# Altium PCB microsmt_pnpboard_v17.pcbdoc (part 3 of 3)
Units mil, origin at the board's own origin, x right, y up, seen from the top; angles counter-clockwise.
Board outline 5834.36 x 5120.39 mil, 2 copper layers (Top Layer, Bottom Layer); 189 components, 130 nets, 641 pads, 1441 vias.
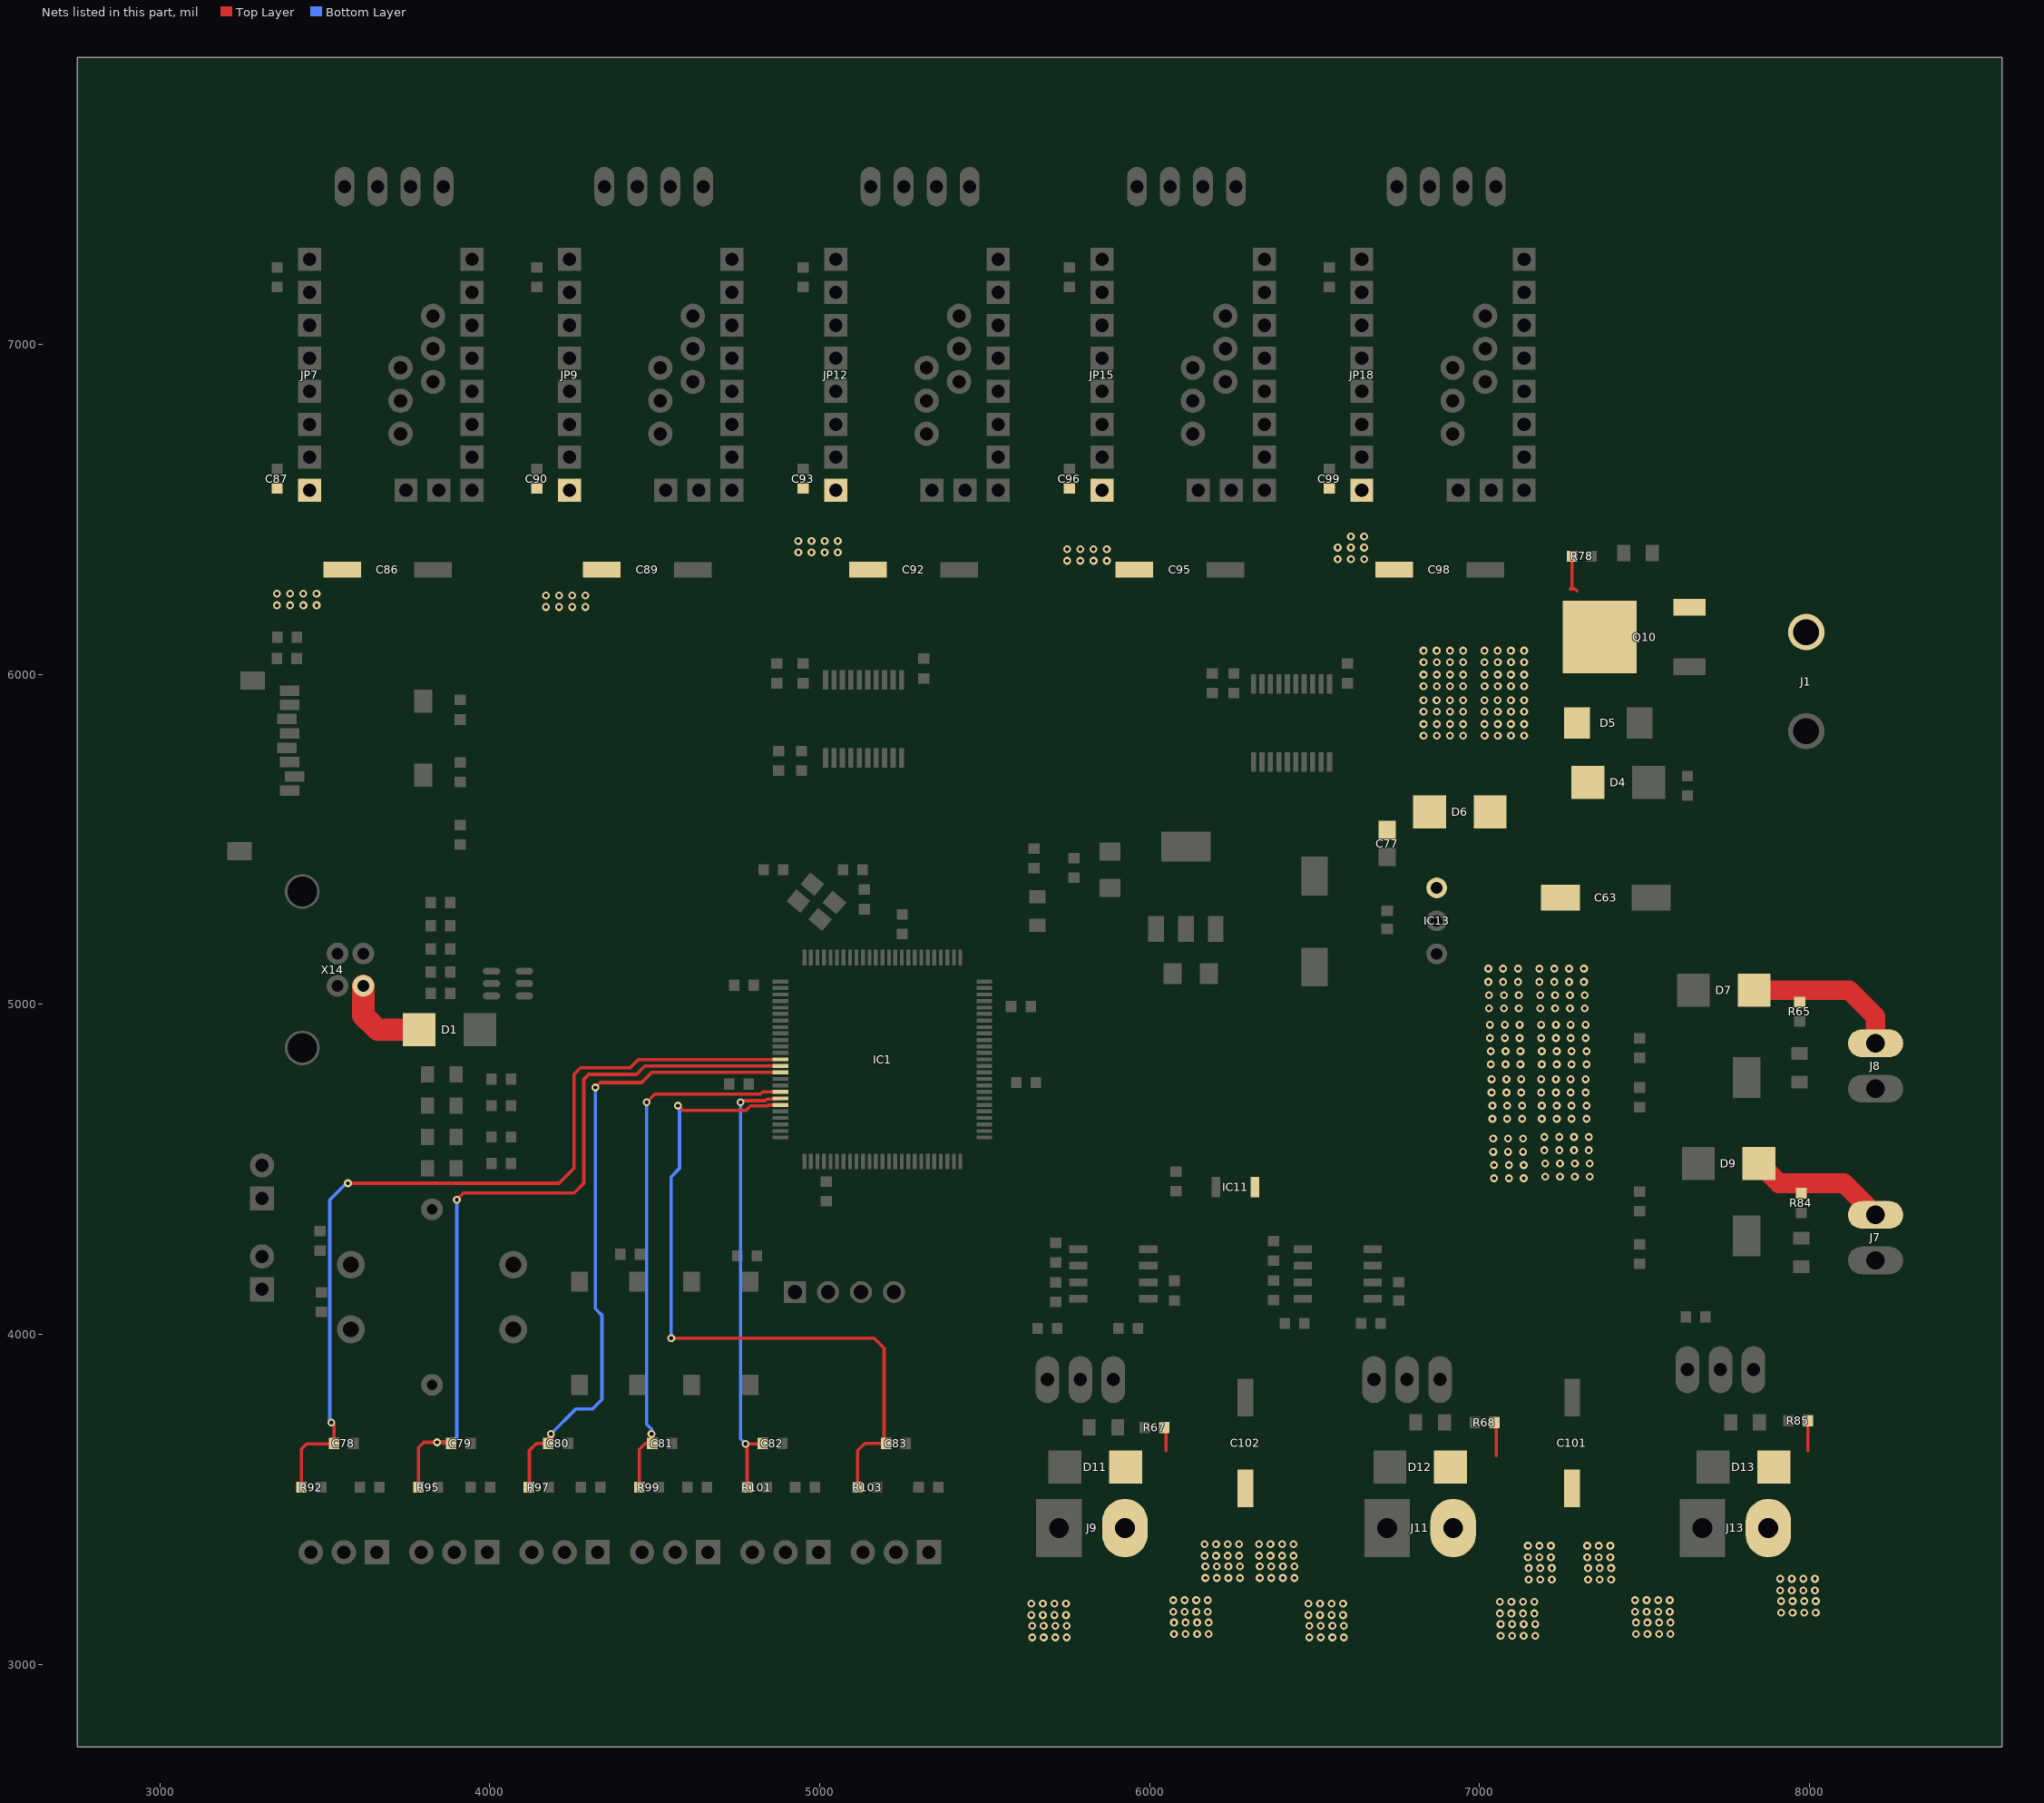
[diagram p3: the nets of this part, all layers, seen from the top]

## Via types
v1: diameter 24, hole 12, Top Layer to Bottom Layer, 1009 vias
v2: diameter 24.02, hole 12.01, Top Layer to Bottom Layer, 428 vias
v3: diameter 149.61, hole 137.8, Top Layer to Bottom Layer, 4 vias

## Nets (pads, with @x,y where several pads share a name; then routed paths per layer and width w, separated by ;. In a path a pad name is that pad's centre, name@x,y a point inside that pad or via, vN(x,y) a via of type N, cw(c..) or ccw(c..) an arc to the next point about the centre after c; other vN are vias at no path point) (continued)
VBB: C63.1 C86.1 C87.1 C89.1 C90.1 C92.1 C93.1 C95.1 C96.1 C98.1 C99.1 C101.1 C102.1 D4.C D5.1 D6.A D7.C D9.C D11.C D12.C D13.C IC11.3 J7.1 J8.1 J9.2 J11.2 J13.2 JP7.8 JP9.8 JP12.8 JP15.8 JP18.8 Q10.2 R65.1 R67.1 R68.1 R78.2 R84.1 R85.1 | length 1288.7
  Top Layer w10: R67.1@6045.16,3718.39 6050.5,3713.05 6050.5,3648.39 ; R68.1@7045.16,3733.39 7050.5,3728.05 7050.5,3633.39 ; R78.2@7280.84,6358.39 7280.84,6263.73 7275.5,6258.39 7290.5,6258.39 7295.5,6253.39 ; R85.1@7995.16,3738.39 7995.5,3738.05 7995.5,3648.39
  Top Layer w60: D7.C@7832.5,5043.39 8120.5,5043.39 8200.5,4963.39 J8.1@8200.5,4882.29 ; D9.C@7847.5,4518.39 7907.5,4458.39 8104.4,4458.39 J7.1@8200.5,4362.29
  other v1: 6830.61,5814.64 6870.57,5814.64 6910.53,5814.64 6950.48,5814.64 7015.61,5814.64 7055.57,5814.64 7095.53,5814.64 7135.48,5814.64 6830.55,5849.64 6870.51,5849.64 6910.46,5849.64 6950.42,5849.64 7015.55,5849.64 7055.51,5849.64 7095.46,5849.64 7135.42,5849.64 6830.58,5887.14 6870.54,5887.14 6910.49,5887.14 6950.45,5887.14 7015.58,5887.14 7055.54,5887.14 7095.49,5887.14 7135.45,5887.14 6830.52,5922.14 6870.47,5922.14 6910.43,5922.14 6950.39,5922.14 7015.52,5922.14 7055.47,5922.14 7095.43,5922.14 7135.39,5922.14 6830.61,5964.64 6870.57,5964.64 6910.53,5964.64 6950.48,5964.64 7015.61,5964.64 7055.57,5964.64 7095.53,5964.64 7135.48,5964.64 6830.55,5999.64 6870.51,5999.64 6910.46,5999.64 6950.42,5999.64 7015.55,5999.64 7055.51,5999.64 7095.46,5999.64 7135.42,5999.64 6830.58,6037.14 6870.54,6037.14 6910.49,6037.14 6950.45,6037.14 7015.58,6037.14 7055.54,6037.14 7095.49,6037.14 7135.45,6037.14 6830.52,6072.14 6870.47,6072.14 6910.43,6072.14 6950.39,6072.14 7015.52,6072.14 7055.47,6072.14 7095.43,6072.14 7135.39,6072.14 4170.61,6204.64 4210.57,6204.64 4250.53,6204.64 4290.48,6204.64 3355.61,6209.64 3395.57,6209.64 3435.53,6209.64 3475.48,6209.64 4170.55,6239.64 4210.51,6239.64 4250.46,6239.64 4290.42,6239.64 3355.55,6244.64 3395.51,6244.64 3435.46,6244.64 3475.42,6244.64 5750.61,6344.64 5790.57,6344.64 5830.53,6344.64 5870.48,6344.64 6570.61,6349.64 6610.57,6349.64 6650.53,6349.64 4935.61,6369.64 4975.57,6369.64 5015.53,6369.64 5055.48,6369.64 5750.55,6379.64 5790.51,6379.64 5830.46,6379.64 5870.42,6379.64 6570.55,6384.64 6610.51,6384.64 6650.46,6384.64 4935.55,6404.64 4975.51,6404.64 5015.46,6404.64 5055.42,6404.64 6610.5,6418.39 6650.5,6418.39
  other v2: 5644.25,3082.14 5679.25,3082.14 5714.25,3082.14 5749.25,3082.14 6484.25,3082.14 6519.25,3082.14 6554.25,3082.14 6589.25,3082.14 7064.25,3087.14 7099.25,3087.14 7134.25,3087.14 7169.25,3087.14 6074.25,3092.14 6109.25,3092.14 6144.25,3092.14 6179.25,3092.14 7474.25,3092.14 7509.25,3092.14 7544.25,3092.14 7579.25,3092.14 5644.25,3117.14 5679.25,3117.14 5714.25,3117.14 5749.25,3117.14 6484.25,3117.14 6519.25,3117.14 6554.25,3117.14 6589.25,3117.14 7064.25,3122.14 7099.25,3122.14 7134.25,3122.14 7169.25,3122.14 6074.25,3127.14 6109.25,3127.14 6144.25,3127.14 6179.25,3127.14 7474.25,3127.14 7509.25,3127.14 7544.25,3127.14 7579.25,3127.14 5641.75,3149.64 5676.75,3149.64 5711.75,3149.64 5746.75,3149.64 6481.75,3149.64 6516.75,3149.64 6551.75,3149.64 6586.75,3149.64 7061.75,3154.64 7096.75,3154.64 7131.75,3154.64 7166.75,3154.64 7914.25,3157.14 7949.25,3157.14 7984.25,3157.14 8019.25,3157.14 6071.75,3159.64 6106.75,3159.64 6141.75,3159.64 6176.75,3159.64 7471.75,3159.64 7506.75,3159.64 7541.75,3159.64 7576.75,3159.64 5641.75,3184.64 5676.75,3184.64 5711.75,3184.64 5746.75,3184.64 6481.75,3184.64 6516.75,3184.64 6551.75,3184.64 6586.75,3184.64 7061.75,3189.64 7096.75,3189.64 7131.75,3189.64 7166.75,3189.64 7914.25,3192.14 7949.25,3192.14 7984.25,3192.14 8019.25,3192.14 6071.75,3194.64 6106.75,3194.64 6141.75,3194.64 6176.75,3194.64 7471.75,3194.64 7506.75,3194.64 7541.75,3194.64 7576.75,3194.64 7911.75,3224.64 7946.75,3224.64 7981.75,3224.64 8016.75,3224.64 7149.25,3257.14 7184.25,3257.14 7219.25,3257.14 7329.25,3257.14 7364.25,3257.14 7399.25,3257.14 7911.75,3259.64 7946.75,3259.64 7981.75,3259.64 8016.75,3259.64 6169.25,3262.14 6204.25,3262.14 6239.25,3262.14 6274.25,3262.14 6334.25,3262.14 6369.25,3262.14 6404.25,3262.14 6439.25,3262.14 7149.25,3292.14 7184.25,3292.14 7219.25,3292.14 7329.25,3292.14 7364.25,3292.14 7399.25,3292.14 6169.25,3297.14 6204.25,3297.14 6239.25,3297.14 6274.25,3297.14 6334.25,3297.14 6369.25,3297.14 6404.25,3297.14 6439.25,3297.14 7146.75,3324.64 7181.75,3324.64 7216.75,3324.64 7326.75,3324.64 7361.75,3324.64 7396.75,3324.64 6166.75,3329.64 6201.75,3329.64 6236.75,3329.64 6271.75,3329.64 6331.75,3329.64 6366.75,3329.64 6401.75,3329.64 6436.75,3329.64 7146.75,3359.64 7181.75,3359.64 7216.75,3359.64 7326.75,3359.64 7361.75,3359.64 7396.75,3359.64 6166.75,3364.64 6201.75,3364.64 6236.75,3364.64 6271.75,3364.64 6331.75,3364.64 6366.75,3364.64 6401.75,3364.64 6436.75,3364.64 7044.25,4473.39 7089.25,4473.39 7134.25,4473.39 7199.25,4478.39 7244.25,4478.39 7289.25,4478.39 7334.25,4478.39 7044.25,4513.39 7089.25,4513.39 7134.25,4513.39 7199.25,4518.39 7244.25,4518.39 7289.25,4518.39 7334.25,4518.39 7041.75,4553.39 7086.75,4553.39 7131.75,4553.39 7196.75,4558.39 7241.75,4558.39 7286.75,4558.39 7331.75,4558.39 7041.75,4593.39 7086.75,4593.39 7131.75,4593.39 7196.75,4598.39 7241.75,4598.39 7286.75,4598.39 7331.75,4598.39 7039.25,4653.39 7084.25,4653.39 7129.25,4653.39 7189.25,4653.39 7234.25,4653.39 7279.25,4653.39 7324.25,4653.39 7039.25,4693.39 7084.25,4693.39 7129.25,4693.39 7189.25,4693.39 7234.25,4693.39 7279.25,4693.39 7324.25,4693.39 7036.75,4733.39 7081.75,4733.39 7126.75,4733.39 7186.75,4733.39 7231.75,4733.39 7276.75,4733.39 7321.75,4733.39 7036.75,4773.39 7081.75,4773.39 7126.75,4773.39 7186.75,4773.39 7231.75,4773.39 7276.75,4773.39 7321.75,4773.39 7034.25,4818.39 7079.25,4818.39 7124.25,4818.39 7189.25,4818.39 7234.25,4818.39 7279.25,4818.39 7324.25,4818.39 7034.25,4858.39 7079.25,4858.39 7124.25,4858.39 7189.25,4858.39 7234.25,4858.39 7279.25,4858.39 7324.25,4858.39 7031.75,4898.39 7076.75,4898.39 7121.75,4898.39 7186.75,4898.39 7231.75,4898.39 7276.75,4898.39 7321.75,4898.39 7031.75,4938.39 7076.75,4938.39 7121.75,4938.39 7186.75,4938.39 7231.75,4938.39 7276.75,4938.39 7321.75,4938.39 7029.25,4988.39 7074.25,4988.39 7119.25,4988.39 7184.25,4988.39 7229.25,4988.39 7274.25,4988.39 7319.25,4988.39 7029.25,5028.39 7074.25,5028.39 7119.25,5028.39 7184.25,5028.39 7229.25,5028.39 7274.25,5028.39 7319.25,5028.39 7026.75,5068.39 7071.75,5068.39 7116.75,5068.39 7181.75,5068.39 7226.75,5068.39 7271.75,5068.39 7316.75,5068.39 7026.75,5108.39 7071.75,5108.39 7116.75,5108.39 7181.75,5108.39 7226.75,5108.39 7271.75,5108.39 7316.75,5108.39
VBB_IN: J1.2 Q10.3
VBBREG: C77.1 D6.C IC13.1
VUSB: D1.A X14.VBUS | length 277
  Top Layer w68: X14.VBUS@3617,5056.39 3617.37,5056.02 3617.37,4966.52 3660.5,4923.39 D1.A@3786.5,4923.39
X_MAX: C79.1 IC1.39 R95.2 | length 2346.3
  Top Layer w10: R95.2@3784.39,3537.01 3784.39,3657.27 3800.5,3673.39 v1(3840.5,3673.39) 3879.23,3673.39 C79.1@3882.81,3669.81 ; v2(3900.5,4408.39) 3920.5,4428.39 4255.5,4428.39 4285.5,4458.39 4285.5,4773.39 4300.5,4788.39 4445.5,4788.39 4470.5,4813.38 IC1.39@4881.5,4813.38
  Bottom Layer w10: v1(3840.5,3673.39) 3885.5,3673.39 3900.5,3688.39 v2(3900.5,4408.39)
X_MIN: C78.1 IC1.38 R92.2 | length 2689.3
  Top Layer w10: R92.2@3430.05,3537.01 3430.05,3652.94 3445.5,3668.39 3527.06,3668.39 C78.1@3528.48,3669.81 3528.48,3725.41 v1(3520.5,3733.39) ; v2@3565.5,4458.39 4210.5,4458.39 4255.5,4503.39 4255.5,4788.39 4275.5,4808.39 4425.81,4808.39 4450.81,4833.38 IC1.38@4881.5,4833.38
  Bottom Layer w10: v1(3520.5,3733.39) 3520.5,3728.39 3515.5,3733.39 3515.5,4408.39 3565.5,4458.39 v2(3570.5,4458.39)
Y_MAX: C81.1 IC1.43 R99.2 | length 1621.6
  Top Layer w10: R99.2@4453.68,3537.01 4453.68,3651.56 4471.92,3669.81 C81.1@4493.05,3669.81 4490.5,3672.35 v2(4490.5,3698.39) ; v2(4475.5,4703.39) 4500.5,4728.39 4820.5,4728.39 4827.5,4735.38 IC1.43@4881.5,4735.38
  Bottom Layer w10: v2(4475.5,4703.39) 4475.5,3728.39 4490.5,3713.39 v2(4490.5,3698.39)
Y_MIN: C80.1 IC1.40 R97.2 | length 1941.9
  Top Layer w10: R97.2@4119.03,3537.01 4120.5,3538.48 4120.5,3648.39 4141.92,3669.81 C80.1@4178.09,3669.81 ; v2(4320.5,4748.39) 4335.5,4763.39 4460.5,4763.39 4491.5,4794.38 IC1.40@4881.5,4794.38
  Top Layer w20: C80.1@4178.09,3669.81 4185.5,3677.22 v1(4185.5,3698.39)
  Bottom Layer w10: v1(4185.5,3698.39) 4260.93,3773.81 4310.93,3773.81 4340.5,3803.39 4340.5,4058.39 4320.5,4078.39 v2(4320.5,4748.39)
Z_MAX: C83.1 IC1.45 R103.2 | length 2196.1
  Top Layer w10: v2(4550.5,3988.39) 5165.5,3988.39 5195.5,3958.39 5195.5,3676.01 C83.1@5201.7,3669.81 5136.92,3669.81 5115.09,3647.98 R103.2@5115.09,3537.01 ; v2(4570.5,4693.39) 4571.5,4693.39 4585.5,4679.39 4777.5,4679.39 4790.5,4692.39 4842.13,4692.39 4844.82,4695.38 IC1.45@4881.5,4695.38
  Bottom Layer w10: v2(4550.5,3988.39) 4550.5,4478.39 4575.5,4503.39 4575.5,4688.39 v2(4570.5,4693.39)
Z_MIN: C82.1 IC1.44 R101.2 | length 1353.4
  Top Layer w10: v2(4760.5,4703.39) 4765.5,4708.39 4835.5,4708.39 4840.5,4713.39 4879.5,4713.39 IC1.44@4881.5,4715.38 ; R101.2@4780.45,3537.01 4780.45,3663.44 v2(4775.5,3668.39) 4826.27,3668.39 C82.1@4827.69,3669.81
  Bottom Layer w10: v2(4760.5,4703.39) 4760.5,3683.39 v2(4775.5,3668.39)
"": 
pads on no net: H1.1 H1.2 H2.1 H2.2 H3.1 H3.2 H4.1 H4.2 H5.1 H5.2 IC1.1 IC1.2 IC1.3 IC1.4 IC1.5 IC1.6 IC1.7 IC1.8 IC1.9 IC1.13 IC1.14 IC1.16 IC1.18 IC1.20 IC1.21 IC1.24 IC1.25 IC1.26 IC1.27 IC1.52 IC1.60 IC1.61 IC1.62 IC1.63 IC1.67 IC1.86 IC1.87 IC1.88 IC1.89 IC1.90 IC1.91 IC1.92 IC1.93 IC1.94 IC1.95 IC1.100 IC4.14 IC9.2 IC9.9 IC9.14 IC9.19 IC14.1 IC14.8 IC15.1 IC15.4 IC15.5 IC15.8 JP71.4 JP71.5 JP91.4 JP91.5 JP121.4 JP121.5 JP151.4 JP151.5 JP181.4 JP181.5 Q2.2 Q2.4 S1.3 S2.3 S3.1 S3.3 U1.1 U1.8 U1.CD1 U1.GND3 X14.S1 X14.S2
copper on no net:
  other v3: 3295.5,3233.39 8220.5,3233.39 3285.5,7458.39 8215.5,7458.39

## Polygon pours and split planes (outlines as drawn)
1B on Top Layer (solid, remove dead copper): 3400.5,7103.39 3405.5,7108.39 3500.5,7108.39 3505.5,7113.39 3505.5,7328.39 3490.5,7343.39 3460.5,7343.39 3450.5,7353.39 3450.5,7538.39 3475.5,7563.39 3585.5,7563.39 3605.5,7543.39 3605.5,7023.39 3590.5,7008.39 3410.5,7008.39 3400.5,7018.39
1A on Top Layer (solid, remove dead copper, pour order 1): 3400.5,6988.39 3410.5,6998.39 3600.5,6998.39 3615.5,7013.39 3615.5,7543.39 3635.5,7563.39 3688.6,7563.39 3710.3,7541.68 3710.3,6998.19 3670.5,6958.39 3670.5,6933.39 3645.5,6908.39 3410.5,6908.39 3400.5,6918.39
2A on Bottom Layer (solid, remove dead copper, pour order 2): 3705.11,7509.33 3705.11,7403 3680.5,7378.39 3535.5,7378.39 3510.5,7353.39 3510.5,6914.25 3504.4,6908.15 3410.26,6908.15 3400.5,6898.39 3400.5,6813.39 3405.5,6808.39 3580.5,6808.39 3600.5,6828.39 3600.5,7248.39 3625.5,7273.39 3785.5,7273.39 3805.5,7293.39 3805.5,7543.39 3790.5,7558.39 3725.5,7558.39 3705.5,7538.39 3705.5,7509.72
2B on Bottom Layer (solid, remove dead copper, pour order 3): 3400.5,6793.39 3405.5,6798.39 3595.5,6798.39 3610.5,6813.39 3610.5,7228.39 3645.5,7263.39 3800.5,7263.39 3815.5,7278.39 3815.5,7533.39 3840.5,7558.39 3935.5,7558.39 3980.5,7513.39 3980.5,7313.39 3975.5,7308.39 3914.04,7308.39 3896.53,7290.87 3896.53,7149.41 3890.5,7143.39 3800.5,7143.39 3780.5,7123.39 3780.5,7008.39 3760.5,6988.39 3700.5,6988.39 3680.5,6968.39 3680.5,6758.39 3635.5,6713.39 3410.5,6713.39 3400.5,6723.39
VBB_IN on Top Layer (solid, remove dead copper, pour order 4): 8240.5,6453.39 8220.5,6473.39 7620.5,6473.39 7595.5,6448.39 7595.5,6323.39 7575.5,6303.39 7550.5,6303.39 7525.5,6278.39 7525.5,6146.08 7558.2,6113.39 7695.5,6113.39 7720.5,6088.39 7720.5,5938.39 7745.5,5913.39 8235.5,5913.39 8240.5,5918.39
VBB on Top Layer (solid, remove dead copper, pour order 5): 7470.5,6303.39 7280.5,6303.39 7260.5,6283.39 7260.5,6188.39 7180.5,6108.39 6825.5,6108.39 6765.5,6048.39 6765.5,5683.39 6780.5,5668.39 6919,5668.39 6941,5646.39 6941,5271.47 6959.08,5253.39 7368.52,5253.39 7383.3,5268.16 7383.3,5901.18 7405.5,5923.39 7475.5,5923.39 7490.5,5938.39 7490.5,6283.39
$2N167 on Top Layer (solid, remove dead copper, pour order 6): 7420.5,5778.39 7420.5,5898.39 7430.5,5908.39 7505.5,5908.39 7520.5,5923.39 7520.5,6073.39 7525.5,6078.39 7685.5,6078.39 7700.5,6063.39 7700.5,5673.39 7695.5,5668.39 7600.5,5668.39 7590.5,5678.39 7590.5,5726.2 7570.5,5746.2 7548.32,5768.39 7425.5,5768.39 7420.5,5773.39
VBBREG on Top Layer (solid, remove dead copper, pour order 7): 6695.5,5643.39 6905.5,5643.39 6920.5,5628.39 6920.5,5318.39 6905.5,5303.39 6770.5,5303.39 6765.5,5308.39 6765.5,5484.19 6758.44,5491.25 6692.64,5491.25 6680.5,5503.39 6680.5,5633.39 6690.5,5643.39
GND on Top Layer (solid, remove dead copper, pour order 8): 6670.5,5263.39 6815.5,5263.39 6830.5,5248.39 6830.5,5228.39 6840.5,5218.39 6915.5,5218.39 6920.5,5223.39 6920.5,5288.39 6915.5,5293.39 6765.5,5293.39 6755.5,5303.39 6755.5,5468.39 6740.5,5483.39 6230.5,5483.39 6200.5,5453.39 6200.5,5332.94 6214.34,5319.1 6654.79,5319.1 6665.5,5308.39 6665.5,5268.39
GND on Top Layer (solid, remove dead copper, pour order 9): 6200.5,5463.39 6200.5,5623.39 6220.5,5643.39 6660.5,5643.39 6670.5,5633.39 6670.5,5448.39 6660.5,5438.39 6200.5,5438.39
3.3V on Top Layer (solid, remove dead copper, pour order 10): 5610.5,5523.39 5740.5,5523.39 5860.5,5643.39 6170.14,5643.39 6180.5,5633.03 6180.5,5333.39 6170.5,5323.39 6150.5,5323.39 6130.5,5303.39 6130.5,5163.39 6120.5,5153.39 6070.5,5153.39 6060.5,5163.39 6060.5,5283.39 6040.5,5303.39 5934.5,5303.39 5927.5,5310.39 5927.5,5400.03 5919.15,5408.39 5696.52,5408.39 5687.45,5417.46 5687.45,5439.64 5684.04,5443.05 5615.84,5443.05 5605.5,5453.39 5605.5,5518.39
VBB on Top Layer (solid, remove dead copper, pour order 11): 6305.5,4478.39 6330.5,4503.39 6330.5,4643.39 6375.5,4688.39 7383.27,4688.39 7383.27,4426.16 7315.5,4358.39 6310.5,4358.39 6305.5,4363.39
VBB on Top Layer (solid, pour order 12): 6945.5,4713.39 6875.5,4643.39 7380.5,4648.39 7383.3,4653.98 7383.3,4761.18 6952.7,4761.18 6945.5,4768.39
12VREG on Top Layer (solid, pour order 13): 6165.5,4493.39 6210.5,4493.39 6230.5,4473.39 6230.5,4408.39 6240.5,4398.39 6280.5,4398.39 6295.5,4383.39 6295.5,4363.39 6285.5,4353.39 6170.5,4353.39 6165.5,4358.39
VBB on Top Layer (solid, remove dead copper, pour order 14): 6941,5375.92 7383.3,5375.92 7383.3,4668.39 7040.5,4668.39 6945.5,4763.39 6945.5,5371.42
VBB on Top Layer (solid, remove dead copper, pour order 15): 3323.83,6593.19 3575.67,6593.19 3610.72,6558.15 3610.72,6413.17 3630.5,6393.39 3680.5,6393.39 3705.5,6368.39 3705.5,6180.73 3690.62,6165.85 3318.04,6165.85 3300.5,6183.39 3300.5,6583.39 3310.5,6593.39 3320.5,6593.39 3320.7,6593.19
VBB on Top Layer (solid, remove dead copper, pour order 16): 4121.55,6593.19 4376.35,6593.19 4411.39,6558.15 4411.39,6387.5 4425.5,6373.39 4480.5,6373.39 4500.5,6353.39 4500.5,6174.27 4480.02,6153.8 4130.09,6153.8 4120.5,6163.39 4120.5,6592.14
VBB on Top Layer (solid, remove dead copper, pour order 17): 4925.31,6593.19 5205.7,6593.19 5225.5,6573.39 5225.5,6423.39 5235.5,6413.39 5275.42,6413.39 5285.11,6403.7 5285.11,6298 5275.5,6288.39 4934.29,6288.39 4905.08,6317.6 4905.08,6587.97 4910.5,6593.39 4925.11,6593.39
VBB on Top Layer (solid, remove dead copper, pour order 18): 5731.54,6576.41 5997.48,6576.41 6010.5,6563.39 6010.5,6403.39 6015.5,6398.39 6071.53,6398.39 6092.2,6377.72 6092.2,6210.08 6075.5,6193.39 5740.5,6193.39 5715.5,6218.39 5715.5,6573.39 5720.5,6578.39 5729.56,6578.39
VBB on Top Layer (solid, remove dead copper, pour order 19): 6770.7,6593.19 6795.5,6568.39 6795.5,6473.39 6815.5,6453.39 6885.5,6453.39 6895.5,6443.39 6895.5,6298.2 6879.6,6282.3 6526.59,6282.3 6510.5,6298.39 6510.5,6573.39 6530.3,6593.19
GND on Top Layer (solid, remove dead copper, pour order 20): 5615.5,4933.39 5615.5,5263.39 5625.5,5273.39 5710.5,5273.39 5720.5,5283.39 5720.5,5368.39 5745.07,5392.95 5905.5,5392.95 5915.5,5382.95 5915.5,5268.39 5924,5259.88 5935.06,5259.88 6038.65,5259.88 6050.5,5248.03 6050.5,5133.39 6060.5,5123.39 6095.5,5123.39 6105.5,5113.39 6105.5,4898.39 6090.5,4883.39 5635.5,4883.39 5615.5,4903.39
3.3V on Top Layer (solid, remove dead copper, pour order 21): 5585.5,4883.39 5555.5,4883.39 5545.5,4893.39 5545.5,5143.39 5510.5,5178.39 5245.5,5178.39 5235.5,5188.39 5220.5,5203.39 5220.5,5233.39 5225.5,5238.39 5230.5,5238.39 5275.5,5238.39 5290.5,5253.39 5290.5,5513.39 5300.5,5523.39 5645.5,5523.39 5650.5,5518.39 5650.5,5443.05 5615.16,5443.05 5605.5,5433.39 5605.5,4893.39 5595.5,4883.39
VBB on Mid-Layer 2 (solid, remove dead copper, pour order 22): 3355.97,6593.19 7155.2,6593.19 7190.5,6557.89 7190.5,5793.39 7135.5,5738.39 6685.5,5738.39 6670.5,5753.39 6670.5,6073.39 6620.5,6123.39 3330.5,6123.39 3300.5,6153.39 3300.5,6578.39 3315.5,6593.39 3355.78,6593.39
3.3V on Mid-Layer 2 (solid, remove dead copper, pour order 23): 7790.46,7203.43 7880.5,7113.39 7880.5,5323.39 7820.5,5263.39 5394.19,5263.39 5376.55,5281.02 5376.55,5484.44 5400.5,5508.39 5800.5,5508.39 5860.5,5568.39 5860.5,5713.39 5875.5,5728.39 6500.5,5728.39 6545.5,5683.39 7233.52,5683.39 7332.65,5782.52 7332.65,6561.24 7250.5,6643.39 3340.5,6643.39 3315.5,6668.39 3315.5,7192.23 3326.7,7203.43
VBB on Mid-Layer 2 (solid, remove dead copper, pour order 24): 8195.45,5153.39 8290.45,5058.39 8290.45,3493.34 8230.5,3433.39 8130.5,3433.39 8090.5,3393.39 8090.5,3233.39 7915.5,3058.39 5735.5,3058.39 5595.5,3198.39 5595.5,3713.39 5635.5,3753.39 7220.5,3753.39 7240.5,3773.39 7240.5,3958.39 7185.5,4013.39 7020.97,4013.39 7000.97,4033.39 7000.97,5138.85 7015.5,5153.39
3.3V on Mid-Layer 2 (solid, remove dead copper, pour order 25): 3360.67,7258.56 3485.5,7383.39 7625.12,7383.39 8270.5,6738 8270.5,5303.39 8230.5,5263.39 7785.5,5263.39 7780.5,5268.39 7780.5,6553.39 7450.5,6883.39 3510.5,6883.39 3360.67,7033.21
5V on Top Layer (solid, remove dead copper, pour order 26): 6145.5,4988.39 6145.5,5118.09 6160.8,5133.39 6160.8,5248.68 6190.5,5278.39 6530.5,5278.39 6590.5,5218.39 6790.5,5218.39 6820.5,5188.39 6905.5,5188.39 6920.5,5173.39 6920.5,4918.39 6885.5,4883.39 6170.5,4883.39 6145.5,4908.39
5V on Mid-Layer 2 (solid, remove dead copper, pour order 27): 6894.73,5193.39 6931.72,5156.4 6931.72,4199.61 6690.5,3958.39 5625.5,3958.39 5475.5,3808.39 5475.5,3298.39 5380.5,3203.39 3485.5,3203.39 3400.5,3288.39 3400.5,3608.39 3715.5,3923.39 5165.5,3923.39 5645.5,4403.39 6460.5,4403.39 6596.5,4539.39 6596.5,5164.39 6625.5,5193.39
GND on Top Layer (solid, remove dead copper, pour order 28): 5000.5,4943.39 5000.5,4668.39 5015.5,4653.39 5375.5,4653.39 5385.5,4663.39 5385.5,4988.39 5370.5,5003.39 5020.5,5003.39 5000.5,4983.39
GND on Top Layer (solid, remove dead copper, pour order 29): 3840.5,5618.39 3840.5,5743.39 3830.5,5753.39 3699.05,5753.39 3693.55,5747.89 3693.55,5620.34 3695.5,5618.39
GND on Top Layer (solid, remove dead copper, pour order 30): 6160.5,4778.39 6175.5,4793.39 6540.5,4793.39 6590.5,4843.39 6880.5,4843.39 6890.5,4833.39 6890.5,4723.39 6880.5,4713.39 6325.5,4713.39 6300.5,4688.39 6300.5,4498.39 6275.5,4473.39 6275.5,4418.39 6270.5,4413.39 6240.5,4413.39 6240.5,4533.39 6225.5,4518.39 6165.5,4518.39 6160.5,4523.39
GND on Top Layer (solid, remove dead copper, pour order 31): 3558.14,3626.41 3558.14,3756.03 3590.5,3788.39 5060.5,3788.39 5075.5,3773.39 5075.5,3603.39 5065.5,3593.39 4875.5,3593.39 4855.5,3613.39 4855.5,3698.39 4845.5,3708.39 4750.5,3708.39 4735.5,3693.39 4735.5,3603.39 4720.5,3588.39 4545.5,3588.39 4530.5,3603.39 4530.5,3708.47 4522.7,3716.27 4443.38,3716.27 4430.5,3703.39 4430.5,3618.39 4420.5,3608.39 4230.5,3608.39 4215.5,3623.39 4215.5,3718.39 4210.5,3723.39 4105.5,3723.39 4095.5,3713.39 4095.5,3628.39 4085.5,3618.39 3925.5,3618.39 3915.5,3628.39 3915.5,3698.39 3910.5,3703.39 3765.5,3703.39 3755.5,3693.39 3755.5,3613.39 3735.5,3593.39 3565.5,3593.39 3555.5,3603.39 3555.5,3623.39 3560.5,3628.39 3560.12,3628.39
GND on Top Layer (solid, remove dead copper, pour order 32): 4135.5,3758.39 4135.5,4073.39 4080.5,4128.39 4070.5,4138.39 3955.5,4138.39 3950.5,4143.39 3950.5,4238.39 3965.5,4253.39 4140.5,4253.39 4190.5,4203.39 4345.5,4203.39 4355.5,4193.39 4360.5,4188.39 4360.5,4113.39 4365.5,4108.39 4490.5,4108.39 4495.5,4113.39 4495.5,4183.39 4495.5,4193.39 4510.5,4208.39 4725.5,4208.39 4740.5,4193.39 4740.5,4053.39 4730.5,4043.39 4400.5,4043.39 4385.5,4028.39 4385.5,3742.1 4355.54,3712.14 4276.75,3712.14 4245.5,3743.39 4150.5,3743.39
GND on Top Layer (solid, remove dead copper, pour order 33): 5668.81,4263.39 5684.15,4248.05 5720.84,4248.05 5730.5,4238.39 5730.5,4136.69 5721.85,4128.05 5695.84,4128.05 5635.5,4188.39 5635.5,4263.39
5V on Top Layer (solid, remove dead copper, pour order 34): 3920.5,4978.39 4080.5,4978.39 4095.5,4963.39 4095.5,4858.39 4090.5,4853.39 3920.5,4853.39 3910.5,4863.39 3910.5,4968.39
5V on Mid-Layer 2 (solid, remove dead copper, pour order 35): 3920.5,4978.39 4090.5,4978.39 4250.5,4818.39 4250.5,3908.39 3950.5,3908.39 3950.5,4823.39 3910.5,4863.39 3910.5,4968.39
GND on Mid-Layer 1 (solid, remove dead copper, pour order 36): 3215.5,6143.39 4914.05,6143.39 4949.05,6178.39 5100.27,6178.39 5139.27,6139.39 6616.47,6139.39 6635.5,6120.36 6635.5,4713.39 6345.5,4713.39 6280.5,4648.39 6280.5,4468.39 6245.84,4433.73 6080.5,4433.73 5940.16,4293.39 5595.5,4293.39 5595.5,4173.39 5495.5,4073.39 5495.5,3774.56 5455.5,3734.56 5455.5,3038.39 3445.5,3038.39 3403.94,3079.94 3403.94,3409.94 3395.5,3418.39 3225.5,3418.39 3215.5,3428.39
3.3V on Mid-Layer 2 (solid, remove dead copper, pour order 37): 6605.5,6078.39 3329.29,6078.39 3299.63,6048.73 3299.63,5214.26 3505.5,5008.39 4120.5,5008.39 4290.5,4838.39 4290.5,4075.04 4340.5,4025.04 5087.16,4025.04 5545.5,4483.39 5945.5,4483.39 6115.5,4653.39 6115.5,5473.39 6110.5,5478.39 6410.5,5478.39 6605.5,5673.39 6635.5,5673.39 6640.5,5678.39 6620.5,5698.39 6620.5,6063.39
GND on Top Layer (solid, remove dead copper, pour order 38): 3215.5,5588.39 3215.5,4728.39 3530.5,4728.39 3565.5,4763.39 3565.5,5073.39 3545.5,5093.39 3480.5,5093.39 3450.5,5123.39 3450.5,5203.39 3595.5,5348.39 3595.5,5588.39
GND on Top Layer (solid, remove dead copper, pour order 39): 4950.5,5173.39 4925.5,5198.39 4925.5,5217.38 4879.49,5263.39 4879.49,5314.39 4840.5,5353.39 4813.56,5353.39 4790.5,5376.45 4790.5,5503.39 4800.5,5513.39 5215.5,5513.39 5220.5,5508.39 5270.5,5508.39 5270.5,5258.39 5265.5,5253.39 5190.5,5253.39 5110.5,5173.39
$1N1649 on Top Layer (solid, remove dead copper, pour order 40): 6588,7105.89 6593,7110.89 6688,7110.89 6693,7115.89 6693,7330.89 6678,7345.89 6648,7345.89 6638,7355.89 6638,7540.89 6663,7565.89 6773,7565.89 6793,7545.89 6793,7025.89 6778,7010.89 6598,7010.89 6588,7020.89
$1N1648 on Top Layer (solid, remove dead copper, pour order 41): 6590.6,6990.89 6600.6,7000.89 6790.6,7000.89 6805.6,7015.89 6805.6,7545.89 6825.6,7565.89 6878.7,7565.89 6900.4,7544.18 6900.4,7005.69 6855.6,6960.89 6855.6,6935.89 6830.6,6910.89 6600.6,6910.89 6590.6,6920.89
$1N1635 on Top Layer (solid, remove dead copper, pour order 42): 5798,7105.89 5803,7110.89 5898,7110.89 5903,7115.89 5903,7330.89 5888,7345.89 5858,7345.89 5848,7355.89 5848,7540.89 5873,7565.89 5983,7565.89 6003,7545.89 6003,7025.89 5988,7010.89 5808,7010.89 5798,7020.89
$1N1634 on Top Layer (solid, remove dead copper, pour order 43): 5800.6,6990.89 5810.6,7000.89 6000.6,7000.89 6015.6,7015.89 6015.6,7545.89 6035.6,7565.89 6088.7,7565.89 6110.4,7544.18 6110.4,6990.69 6075.6,6955.89 6075.6,6930.89 6055.6,6910.89 5810.6,6910.89 5800.6,6920.89
$1N5715 on Top Layer (solid, remove dead copper, pour order 44): 4188,7105.89 4193,7110.89 4288,7110.89 4293,7115.89 4293,7330.89 4278,7345.89 4248,7345.89 4238,7355.89 4238,7540.89 4263,7565.89 4373,7565.89 4393,7545.89 4393,7025.89 4378,7010.89 4198,7010.89 4188,7020.89
$1N1606 on Top Layer (solid, remove dead copper, pour order 45): 4190.6,6990.89 4200.6,7000.89 4390.6,7000.89 4405.6,7015.89 4405.6,7545.89 4425.6,7565.89 4478.7,7565.89 4500.4,7544.18 4500.4,7000.69 4460.6,6960.89 4460.6,6935.89 4435.6,6910.89 4200.6,6910.89 4190.6,6920.89
$1N1621 on Top Layer (solid, remove dead copper, pour order 46): 4996.39,7108.78 5001.39,7113.78 5096.39,7113.78 5101.39,7118.78 5101.39,7333.78 5086.39,7348.78 5056.39,7348.78 5046.39,7358.78 5046.39,7543.78 5071.39,7568.78 5181.39,7568.78 5201.39,7548.78 5201.39,7028.78 5186.39,7013.78 5006.39,7013.78 4996.39,7023.78
$1N1620 on Top Layer (solid, remove dead copper, pour order 47): 5000.6,6990.89 5010.6,7000.89 5200.6,7000.89 5215.6,7015.89 5215.6,7545.89 5235.6,7565.89 5288.7,7565.89 5310.4,7544.18 5310.4,7000.69 5270.6,6960.89 5270.6,6935.89 5245.6,6910.89 5010.6,6910.89 5000.6,6920.89
$1N1619 on Bottom Layer (solid, remove dead copper, pour order 48): 5297.61,7514.33 5297.61,7408 5273,7383.39 5128,7383.39 5103,7358.39 5103,6919.25 5096.9,6913.15 5002.76,6913.15 4993,6903.39 4993,6818.39 4998,6813.39 5173,6813.39 5193,6833.39 5193,7253.39 5218,7278.39 5378,7278.39 5398,7298.39 5398,7548.39 5383,7563.39 5318,7563.39 5298,7543.39 5298,7514.72
$1N1605 on Bottom Layer (solid, remove dead copper, pour order 49): 4487.61,7514.33 4487.61,7408 4463,7383.39 4318,7383.39 4293,7358.39 4293,6919.25 4286.9,6913.15 4192.76,6913.15 4183,6903.39 4183,6818.39 4188,6813.39 4363,6813.39 4383,6833.39 4383,7253.39 4408,7278.39 4568,7278.39 4588,7298.39 4588,7548.39 4573,7563.39 4508,7563.39 4488,7543.39 4488,7514.72
$1N7329 on Bottom Layer (solid, remove dead copper, pour order 50): 4185.5,6795.89 4190.5,6800.89 4380.5,6800.89 4395.5,6815.89 4395.5,7230.89 4425.5,7260.89 4580.5,7260.89 4600.5,7280.89 4600.5,7535.89 4625.5,7560.89 4720.5,7560.89 4765.5,7515.89 4765.5,7315.89 4760.5,7310.89 4699.04,7310.89 4681.52,7293.37 4681.52,7151.91 4675.5,7145.89 4585.5,7145.89 4565.5,7125.89 4565.5,7010.89 4545.5,6990.89 4485.5,6990.89 4465.5,6970.89 4465.5,6760.89 4420.5,6715.89 4195.5,6715.89 4185.5,6725.89
$1N1618 on Bottom Layer (solid, remove dead copper, pour order 51): 4995.5,6795.89 5000.5,6800.89 5190.5,6800.89 5205.5,6815.89 5205.5,7230.89 5240.5,7265.89 5395.5,7265.89 5410.5,7280.89 5410.5,7535.89 5435.5,7560.89 5530.5,7560.89 5575.5,7515.89 5575.5,7315.89 5570.5,7310.89 5509.04,7310.89 5491.52,7293.37 5491.52,7151.91 5485.5,7145.89 5395.5,7145.89 5375.5,7125.89 5375.5,7010.89 5355.5,6990.89 5295.5,6990.89 5275.5,6970.89 5275.5,6760.89 5230.5,6715.89 5005.5,6715.89 4995.5,6725.89
$1N1633 on Bottom Layer (solid, remove dead copper, pour order 52): 6102.61,7514.33 6102.61,7408 6078,7383.39 5933,7383.39 5908,7358.39 5908,6919.25 5901.9,6913.15 5807.76,6913.15 5798,6903.39 5798,6818.39 5803,6813.39 5978,6813.39 5998,6833.39 5998,7253.39 6023,7278.39 6183,7278.39 6203,7298.39 6203,7548.39 6188,7563.39 6123,7563.39 6103,7543.39 6103,7514.72
$1N1632 on Bottom Layer (solid, remove dead copper, pour order 53): 5800.5,6795.89 5805.5,6800.89 5995.5,6800.89 6010.5,6815.89 6010.5,7230.89 6045.5,7265.89 6200.5,7265.89 6215.5,7280.89 6215.5,7535.89 6240.5,7560.89 6335.5,7560.89 6380.5,7515.89 6380.5,7315.89 6375.5,7310.89 6314.04,7310.89 6296.52,7293.37 6296.52,7151.91 6290.5,7145.89 6200.5,7145.89 6180.5,7125.89 6180.5,7010.89 6160.5,6990.89 6100.5,6990.89 6080.5,6970.89 6080.5,6760.89 6035.5,6715.89 5810.5,6715.89 5800.5,6725.89
$1N1647 on Bottom Layer (solid, remove dead copper, pour order 54): 6892.61,7514.33 6892.61,7408 6868,7383.39 6723,7383.39 6698,7358.39 6698,6919.25 6691.9,6913.15 6597.76,6913.15 6588,6903.39 6588,6818.39 6593,6813.39 6768,6813.39 6788,6833.39 6788,7253.39 6813,7278.39 6973,7278.39 6993,7298.39 6993,7548.39 6978,7563.39 6913,7563.39 6893,7543.39 6893,7514.72
$1N1646 on Bottom Layer (solid, remove dead copper, pour order 55): 6590.5,6795.89 6595.5,6800.89 6785.5,6800.89 6800.5,6815.89 6800.5,7230.89 6835.5,7265.89 6990.5,7265.89 7005.5,7280.89 7005.5,7535.89 7030.5,7560.89 7125.5,7560.89 7170.5,7515.89 7170.5,7315.89 7165.5,7310.89 7104.04,7310.89 7086.52,7293.37 7086.52,7151.91 7080.5,7145.89 6990.5,7145.89 6970.5,7125.89 6970.5,7010.89 6950.5,6990.89 6890.5,6990.89 6870.5,6970.89 6870.5,6760.89 6825.5,6715.89 6600.5,6715.89 6590.5,6725.89
$2N5943 on Top Layer (solid, remove dead copper, pour order 56): 5760.5,3963.39 5744.24,3947.12 5744.24,3797.12 5720.5,3773.39 5610.5,3773.39 5555.5,3718.39 5555.5,3294.87 5599.89,3250.48 5785.92,3250.48 5820.5,3285.06 5820.5,3753.39 5840.5,3773.39 5840.5,3953.39 5830.5,3963.39
$2N6624 on Top Layer (solid, remove dead copper, pour order 57): 7698,3989.84 7681.74,3973.57 7681.74,3823.57 7658,3799.84 7548,3799.84 7493,3744.84 7493,3321.32 7537.39,3276.94 7723.42,3276.94 7758,3311.51 7758,3779.84 7778,3799.84 7778,3979.84 7768,3989.84
$2N6317 on Top Layer (solid, remove dead copper, pour order 58): 6748,3964.84 6731.74,3948.57 6731.74,3798.57 6708,3774.84 6598,3774.84 6543,3719.84 6543,3296.32 6587.39,3251.94 6773.42,3251.94 6808,3286.51 6808,3754.84 6828,3774.84 6828,3954.84 6818,3964.84
VBB on Top Layer (solid, remove dead copper, pour order 59): 5600.5,3228.39 5555.5,3183.39 5555.5,3083.39 5615.5,3023.39 7995.5,3023.39 8090.5,3118.39 8090.5,3618.39 8045.5,3663.39 7822,3663.39 7775.5,3616.89 7775.5,3303.39 7732.6,3260.48 7533.4,3260.48 7475.5,3318.39 7475.5,3623.39 7435.5,3663.39 6850.5,3663.39 6830.5,3643.39 6830.5,3278.39 6785.5,3233.39 6575.5,3233.39 6520.5,3288.39 6520.5,3628.39 6485.5,3663.39 5870.5,3663.39 5840,3632.89 5840,3278.89 5789.5,3228.39
GND on Mid-Layer 1 (solid, remove dead copper, pour order 60): 5435.5,3003.39 5435.5,3768.39 5465.5,3798.39 5465.5,4108.39 5547.66,4190.54 5570.5,4190.54 5570.5,4327.69 5909.8,4327.69 6030.5,4438.39 6049.49,4446.61 6176.27,4573.39 6180.5,4573.39 6130.5,4623.39 6130.5,4818.14 6600.5,4818.14 6600.5,5823.39 6625.5,5848.39 6625.5,6043.39 6630.5,6063.39 6600.5,6108.39 6262.85,6108.39 6252.85,6098.39 6225.5,6098.39 6150.5,6023.39 5510.5,6023.39 5440.5,6093.39 5060.5,6093.39 5055.5,6088.39 4980.5,6088.39 4945.5,6123.39 3240.5,6123.39 3215.5,6098.39 3195.5,6098.39 3190.5,6103.39 3190.5,7283.39 3230.5,7323.39 3395.5,7323.39 3430.5,7358.39 3430.5,7533.39 3495.5,7598.39 7960.5,7598.39 8025.5,7533.39 8025.5,7338.39 8080.5,7283.39 8255.5,7283.39 8300.5,7238.39 8300.5,3473.39 8255.5,3428.39 8135.5,3428.39 8095.5,3388.39 8095.5,3123.39 7975.5,3003.39
GND on Top Layer (solid, remove dead copper, pour order 61): 3215.5,5573.39 5115.5,5573.39 5465.5,5223.39 5615.5,5223.39 5615.5,5163.39 8290.5,5163.39 8290.5,7248.39 8255.5,7283.39 8090.5,7283.39 8030.5,7343.39 8030.5,7528.39 7954.43,7604.45 3501.57,7604.45 3430.5,7533.39 3430.5,7358.39 3400.5,7328.39 3235.5,7328.39 3215.5,7308.39
GND on Top Layer (solid, remove dead copper, pour order 62): 3215.5,3398.39 3245.5,3368.39 3370.5,3368.39 3405.5,3333.39 3405.5,3078.39 3460.5,3023.39 5440.5,3023.39 5500.5,3083.39 5500.5,3953.39 5520.5,3973.39 6290.5,3973.39 6300.5,3983.39 6300.5,4793.39 5640.5,4793.39 5625.84,4778.73 5625.84,4443.73 5625.5,4443.39 4640.5,4443.39 4630.5,4453.39 4575.5,4453.39 4575.5,4763.39 4555.5,4783.39 3895.93,4783.39 3853.14,4826.18 3597.7,4826.18 3540.5,4883.39 3215.5,4883.39
VUSB on Top Layer (solid, remove dead copper, pour order 63): 3585.5,5078.39 3600.5,5093.39 3665.5,5093.39 3675.5,5083.39 3675.5,5013.39 3628.63,4966.52 3617.37,4966.52 3617.37,5006.52 3585.5,5038.39
VBB on Bottom Layer (solid, remove dead copper, pour order 64): 6956.72,5073.28 6956.72,4462.61 7220.5,4198.83 7220.5,3718.39 7163.5,3661.39 5654.84,3661.39 5555.5,3562.04 5555.5,3078.39 5610.5,3023.39 7995.5,3023.39 8095.5,3123.39 8095.5,4003.39 8175.5,4083.39 8270.5,4083.39 8290.5,4103.39 8290.5,5053.39 8215.61,5128.28 7011.72,5128.28
GND on Bottom Layer (solid, remove dead copper, pour order 66): 3405.5,3078.39 3405.5,3333.39 3370.5,3368.39 3240.5,3368.39 3210.5,3398.39 3210.5,7303.39 3235.5,7328.39 3400.5,7328.39 3430.5,7358.39 3430.5,7533.39 3500.5,7603.39 7955.5,7603.39 8030.5,7528.39 8030.5,7343.39 8090.5,7283.39 8255.5,7283.39 8300.5,7238.39 8300.5,3393.39 8260.5,3353.39 8135.5,3353.39 8095.5,3313.39 8095.5,3123.39 7995.5,3023.39 3460.5,3023.39
$2N86 on Top Layer (solid, remove dead copper, pour order 67): 8275.5,4288.39 8295.5,4268.39 8295.5,4188.39 8230.5,4123.39 7805.5,4123.39 7740.5,4188.39 7740.5,4366.77 7877.29,4366.77 7920.67,4323.39 8025.5,4323.39 8060.5,4288.39
$2N72 on Top Layer (solid, remove dead copper, pour order 68): 8273.92,4813.39 8300.5,4786.81 8300.5,4723.39 8240.5,4663.39 7805.5,4663.39 7740.5,4728.39 7740.5,4867.35 7761.02,4887.87 7856.02,4887.87 7895.5,4848.39 8027.7,4848.39 8062.7,4813.39
GND on Top Layer (solid, remove dead copper, pour order 69): 7400.5,5183.39 7400.5,4413.39 7315.5,4328.39 5449.82,4328.39 5444.82,4323.39 5444.82,3062.71 5405.5,3023.39 7995.5,3023.39 8095.5,3123.39 8095.5,3313.39 8135.5,3353.39 8265.5,3353.39 8300.5,3388.39 8300.5,5183.39

## Other copper
Top Layer:
  drawing of 323 lines, arcs and shapes, not listed
Bottom Layer:
  region net X_MIN: 3525.37,3744.35 3520.5,3755.83 3510.5,3751.24 3509.01,3736.85
  region net SD_CS: 5732.48,4662.63 5734.04,4669.85 5726.96,4676.92 5719.75,4675.36
  region net SD_CS: 5720.63,5547.42 5725.5,5535.95 5735.5,5540.53 5736.99,5554.92
  region net SD_MOSI: 5749.5,4591.32 5745.5,4603.79 5735.5,4603.79 5731.5,4591.32
  region net SD_MISO: 5812.48,4612.63 5814.04,4619.85 5806.96,4626.92 5799.75,4625.36
  region net X_MIN: 3559.27,4462.63 3551.22,4451.18 3556.11,4441.93 3567.69,4446.71
  region net Y_MAX: 4466.49,4695.44 4470.5,4682.97 4480.5,4682.97 4484.51,4695.44
  region net Z_MIN: 4776.25,3680.37 4764.6,3686.36 4757.53,3679.28 4763.52,3667.63
  region net EN1: 6009.51,4756.33 6005.5,4768.8 5995.5,4768.8 5991.49,4756.33
  region net EN1: 5986.49,5855.44 5990.5,5848.39 6000.5,5848.39 6004.51,5855.44
  region net DIR1: 6089.51,4741.33 6085.5,4753.8 6075.5,4753.8 6071.49,4741.33
  region net DIR1: 6059.75,5921.4 6071.4,5915.42 6078.47,5922.49 6072.48,5934.14
  region net STP1: 6041.49,5865.44 6045.5,5852.97 6055.5,5852.97 6059.51,5865.44
  region net STP1: 6028.44,4454.38 6035.5,4458.39 6035.5,4468.39 6028.44,4472.39
  region net STP2: 5619.75,6211.4 5631.4,6205.42 5638.47,6212.49 5632.48,6224.14
  region net STP2: 5866.25,4470.37 5854.6,4476.36 5847.53,4469.28 5853.52,4457.63
  region net EN3: 4902.56,6292.39 4890.09,6288.39 4890.09,6278.39 4902.56,6274.38
  region net P2W: 5016.49,6240.44 5020.5,6227.97 5030.5,6227.97 5034.51,6240.44
  region net P2W: 5034.51,6061.33 5030.5,6073.8 5020.5,6073.8 5016.49,6061.33
  region net STP3: 5926.25,4445.37 5914.6,4451.36 5907.53,4444.28 5913.52,4432.63
  region net DIR3: 4689.51,4331.33 4685.5,4343.39 4675.5,4343.39 4671.49,4331.33
  region net P3W: 5041.49,6120.44 5045.5,6107.97 5055.5,6107.97 5059.51,6120.44
  region net P3W: 5057,5706.86 5055.5,5721.26 5045.5,5725.84 5040.62,5714.36
  region net STP4: 6119.51,4396.33 6115.5,4408.8 6105.5,4408.8 6101.49,4396.33
  region net STP4: 6118.52,6089.14 6112.53,6077.49 6119.6,6070.42 6131.25,6076.4
  region net DIR5: 4536.49,5805.44 4540.5,5792.97 4550.5,5792.97 4554.51,5805.44
  region net DIR5: 4537.48,4522.63 4543.47,4534.28 4536.4,4541.36 4524.75,4535.37
  region net STP5: 5619.51,4146.33 5615.5,4158.8 5605.5,4158.8 5601.49,4146.33
  region net STP5: 5618.52,4374.14 5612.53,4362.49 5619.6,4355.42 5631.25,4361.4
  region net P1_23: 4424.51,4371.33 4420.5,4383.8 4410.5,4383.8 4406.49,4371.33
  region net P1_23: 4401.49,4830.44 4405.5,4817.97 4415.5,4817.97 4419.51,4830.44
  region net P1_22: 5376.25,4335.37 5369.04,4336.92 5361.96,4329.85 5363.52,4322.63
  region net P1_22: 4346.49,4855.44 4350.5,4842.97 4360.5,4842.97 4364.51,4855.44
  region net P1_22: 4359.51,4351.33 4355.5,4363.8 4345.5,4363.8 4341.49,4351.33
  region net PLAY_LED: 5584.51,4111.33 5580.5,4123.8 5570.5,4123.8 5566.49,4111.33
  region net PLAY_LED: 5573.52,4719.14 5571.96,4711.92 5579.04,4704.85 5586.25,4706.4
  region net RESET: 4356.49,5465.44 4360.5,5452.97 4370.5,5452.97 4374.51,5465.44
  region net RESET: 4401.25,4170.37 4389.6,4176.36 4382.53,4169.28 4388.52,4157.63
  region net $1N911: 5371.49,5950.44 5375.5,5937.97 5385.5,5937.97 5389.51,5950.44
  region net $1N911: 5377.48,5737.63 5383.47,5749.28 5376.4,5756.36 5364.75,5750.37
  region net POT_SDA: 4496.49,5780.44 4500.5,5767.97 4510.5,5767.97 4514.51,5780.44
  region net POT_SDA: 4514.51,4636.33 4510.5,4648.8 4500.5,4648.8 4496.49,4636.33
  region net PLAY: 4251.49,4320.44 4255.5,4307.97 4265.5,4307.97 4269.51,4320.44
  region net PLAY: 4101.79,3985.57 4144.07,4013.39 4143.36,4023.39 4097.29,4049.17

## Silkscreen, mask and mechanical layers (free items; w line width, h text height)
Top Overlay:
  text "MicroSMT" at 7468.19,7410.85 h157.48 r315
  text "1B" at 5131.91,7326.97 h38.33
  text "1A" at 5225.31,7326.97 h38.33
  text "2A" at 5319.76,7326.97 h38.33
  text "2B" at 5418.16,7326.97 h38.33
  text "1B" at 5936.91,7326.97 h38.33
  text "1A" at 6025.31,7326.97 h38.33
  text "2A" at 6129.76,7326.97 h38.33
  text "2B" at 6223.16,7326.97 h38.33
  text "PNP Board-V1.7" at 7352.97,7323.95 h135.19 r315
  text "1A" at 3631.91,7321.97 h38.33
  text "2A" at 3731.91,7321.97 h38.33
  text "2B" at 3826.91,7321.97 h38.33
  text "1B" at 4321.91,7321.97 h38.33
  text "2A" at 4514.76,7321.97 h38.33
  text "2B" at 4608.16,7321.97 h38.33
  text "1B" at 6721.91,7321.97 h38.33
  text "1A" at 6825.31,7321.97 h38.33
  text "2A" at 6919.76,7321.97 h38.33
  text "2B" at 7018.16,7321.97 h38.33
  text "1B" at 3528.91,7321.5 h38.33
  text "1A" at 4418.91,7321.5 h38.33
  text "MS2" at 5259.51,6994.16 h33.22
  text "MS2" at 6854.51,6994.16 h33.22
  text "MS2" at 4454.51,6989.16 h33.22
  text "MS2" at 6064.51,6989.16 h33.22
  text "MS2" at 3662.66,6984.75 h33.22
  text "GND" at 5160.16,6924.16 h33.22
  text "GND" at 5959.01,6915.18 h33.22
  text "GND" at 4360.16,6914.16 h33.22
  text "GND" at 3562.66,6909.75 h33.22
  text "GND" at 6760.16,6909.16 h33.22
  text "MS1" at 3567.66,6819.75 h33.22
  text "MS1" at 4364.92,6815.18 h33.22
  text "MS1" at 5167.69,6815.18 h33.22
  text "MS1" at 5963.99,6815.18 h33.22
  text "MS1" at 6765.56,6814.16 h33.22
  text "3.3V" at 3541.21,6714.75 h33.22
  text "3.3V" at 4335.68,6715.18 h33.22
  text "3.3V" at 5144.46,6714.16 h33.22
  text "3.3V" at 6729.46,6709.16 h33.22
  text "3.3V" at 5939.46,6704.16 h33.22
  text "+24V" at 7830.43,6370.03 h77.88
  text "VBB" at 6993.85,5715.03 h77.88
  text "GND" at 7913.85,5565.03 h77.88
  text "3.3V" at 5320.43,5230.03 h77.88
  text "." at 5480.5,5115.35 h65.37
  text "+" at 8160.5,5024.74 h78.45
  text "5V" at 6297.27,4945.03 h77.88
  text "Stop Led" at 3294.24,4796.18 h25.55 r270
  text "P2.4" at 8155.85,4599.49 h32.45
  text "VBB" at 6548.05,4520.03 h77.88
  text "+" at 8160.5,4474.74 h78.45
  text "www.microsmt.com.cn" at 6544.93,4414.49 h32.45
  text "UART0" at 4973.76,4206.71 h38.94
  text "Stop Button" at 3304.24,4074.54 h25.55 r270
  text "P1.22" at 8159.43,4064.49 h32.45
  text "GND" at 4878.28,4017.27 h25.96
  text "3.3V" at 4994.79,4017.27 h25.96
  text "Tx" at 5109.42,4017.27 h25.96
  text "Rx" at 5209.42,4017.27 h25.96
  text "STOP" at 3880.47,3806.71 h38.94
  text "RESET" at 4263.76,3766.71 h38.94
  text "ISP" at 4662.18,3766.71 h38.94
  text "Z-MIN" at 4758.5,3460.61 h44.6
  text "X-MIN" at 3430.77,3456.61 h44.6
  text "X-MAX" at 3760.77,3456.61 h44.6
  text "Y-MAX" at 4430.77,3456.61 h44.6
  text "Y-MIN" at 4093.5,3455.61 h44.6
  text "Z-MAX" at 5089.56,3455.61 h44.6
  text "+" at 7065.5,3254.74 h78.45
  text "+" at 6080.5,3249.74 h78.45
  text "+" at 8020.5,3244.74 h78.45
  text "P2.7" at 6461.3,3229.49 h32.45
  text "P1.23" at 7404.88,3224.49 h32.45
  text "P2.5" at 5461.3,3219.49 h32.45
  text "P1.24" at 3484.88,3074.49 h32.45
  text "P1.25" at 3839.88,3074.49 h32.45
  text "P1.26" at 4179.43,3074.49 h32.45
  text "P1.27" at 4529.43,3074.49 h32.45
  text "P1.28" at 4849.43,3074.49 h32.45
  text "P1.29" at 5169.43,3074.49 h32.45
Bottom Overlay:
  text "www.microsmt.com.cn" at 7702.58,5667.49 h32.45
Mechanical 1:
  lines w10: 3194.5,3019.69 3194.5,7620.39 8312.6,7620.39 8312.6,3019.69 3194.5,3019.69

## Text inside footprints (layer, text, board x,y; h text height)
S1: Mechanical 6 "REF" at 4535.03,4051.63 h37.68 r270
S2: Mechanical 6 "REF" at 4875.03,4051.63 h37.68 r270
S3: Top Overlay "1" at 3636.5,4191.03 h18.99; Top Overlay "2" at 3982.5,4191.03 h18.99; Top Overlay "3" at 3636.5,3994.03 h18.99; Top Overlay "4" at 3982.5,3994.03 h18.99; Top Overlay "+" at 3874.5,4246.64 h66.45; Top Overlay "-" at 3872.5,4057.64 h66.45